# Altium PCB STSPIN 4 IN 1 ESC.PcbDoc (part 2 of 2)
Units mm, origin at the board's own origin, x right, y up, seen from the top; angles counter-clockwise.
Board outline 46 x 52 mm, 4 copper layers (Top Layer, Layer 1, Layer 2, Bottom Layer), stack 0.603 mm thick; 147 components, 145 nets, 686 pads, 138 vias.
Unrouted connection lines stored in the file: 240.
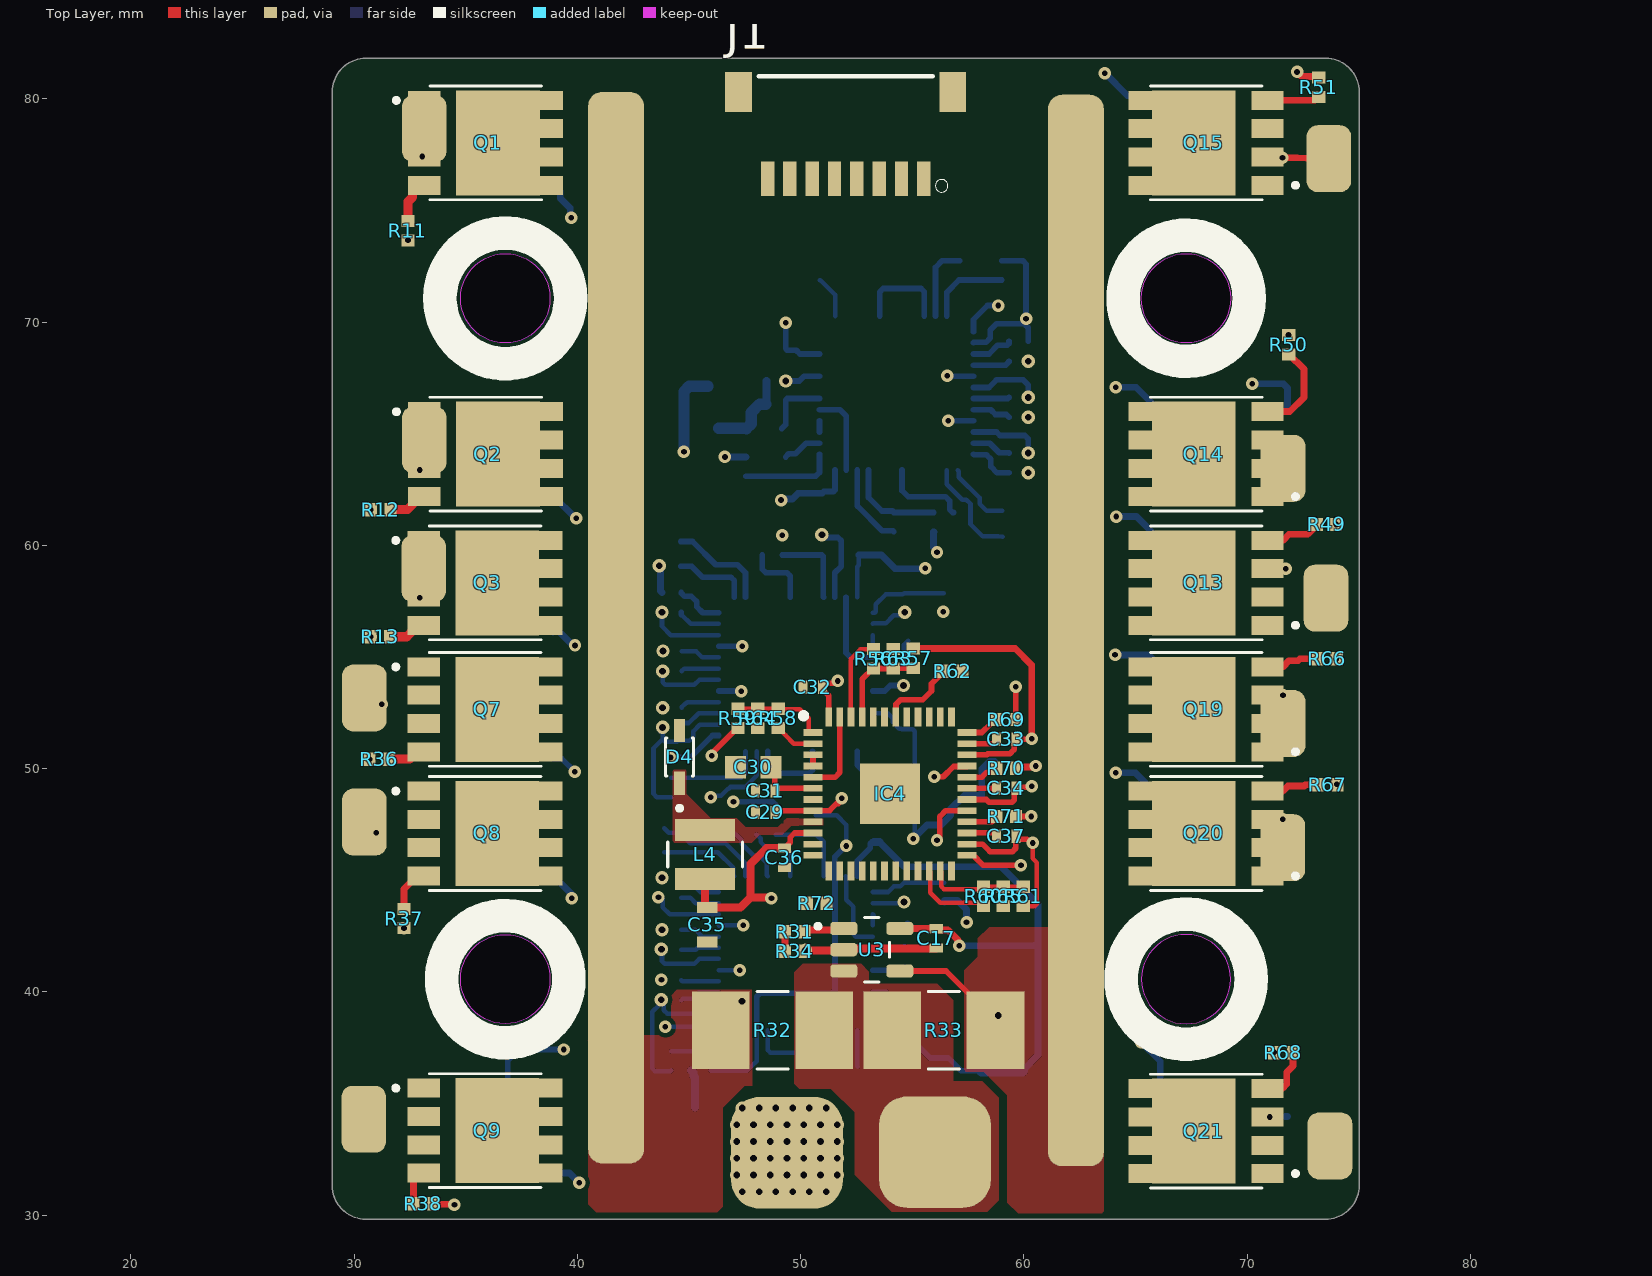
[diagram p0: Top Layer view]

## Silkscreen, mask and mechanical layers (free items; w line width, h text height) (continued)
Mechanical 1: (continued)
  lines w0.254: 29.019,31.316 ccw(c30.519,31.316) 30.519,29.816 73.519,29.816 ccw(c73.519,31.316) 75.019,31.316 75.019,80.316 ccw(c73.519,80.316) 73.519,81.816 30.519,81.816 ccw(c30.519,80.316) 29.019,80.316 29.019,31.316